# Altium PCB tuch-tablotara.PcbDoc
Units mm, origin at the board's own origin, x right, y up, seen from the top; angles counter-clockwise.
Board outline 151 x 86.38 mm, 2 copper layers (Top Layer, Bottom Layer); 7 components, 7 nets, 17 pads, 0 vias.
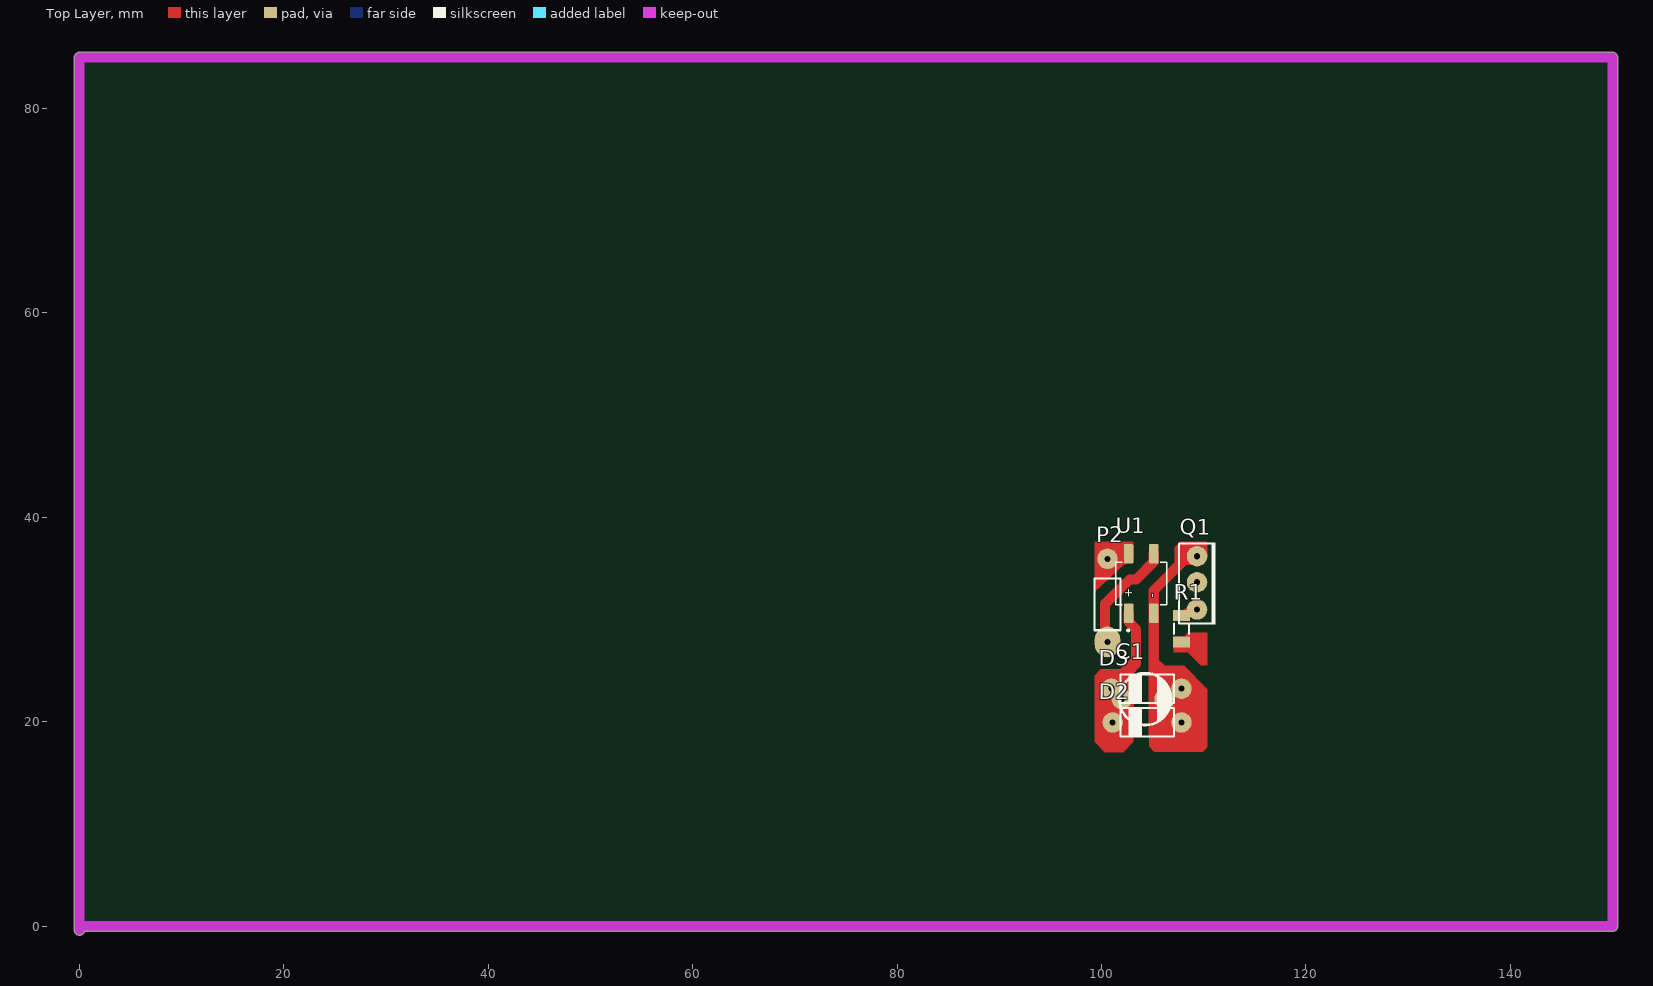
[diagram p0: Top Layer view]
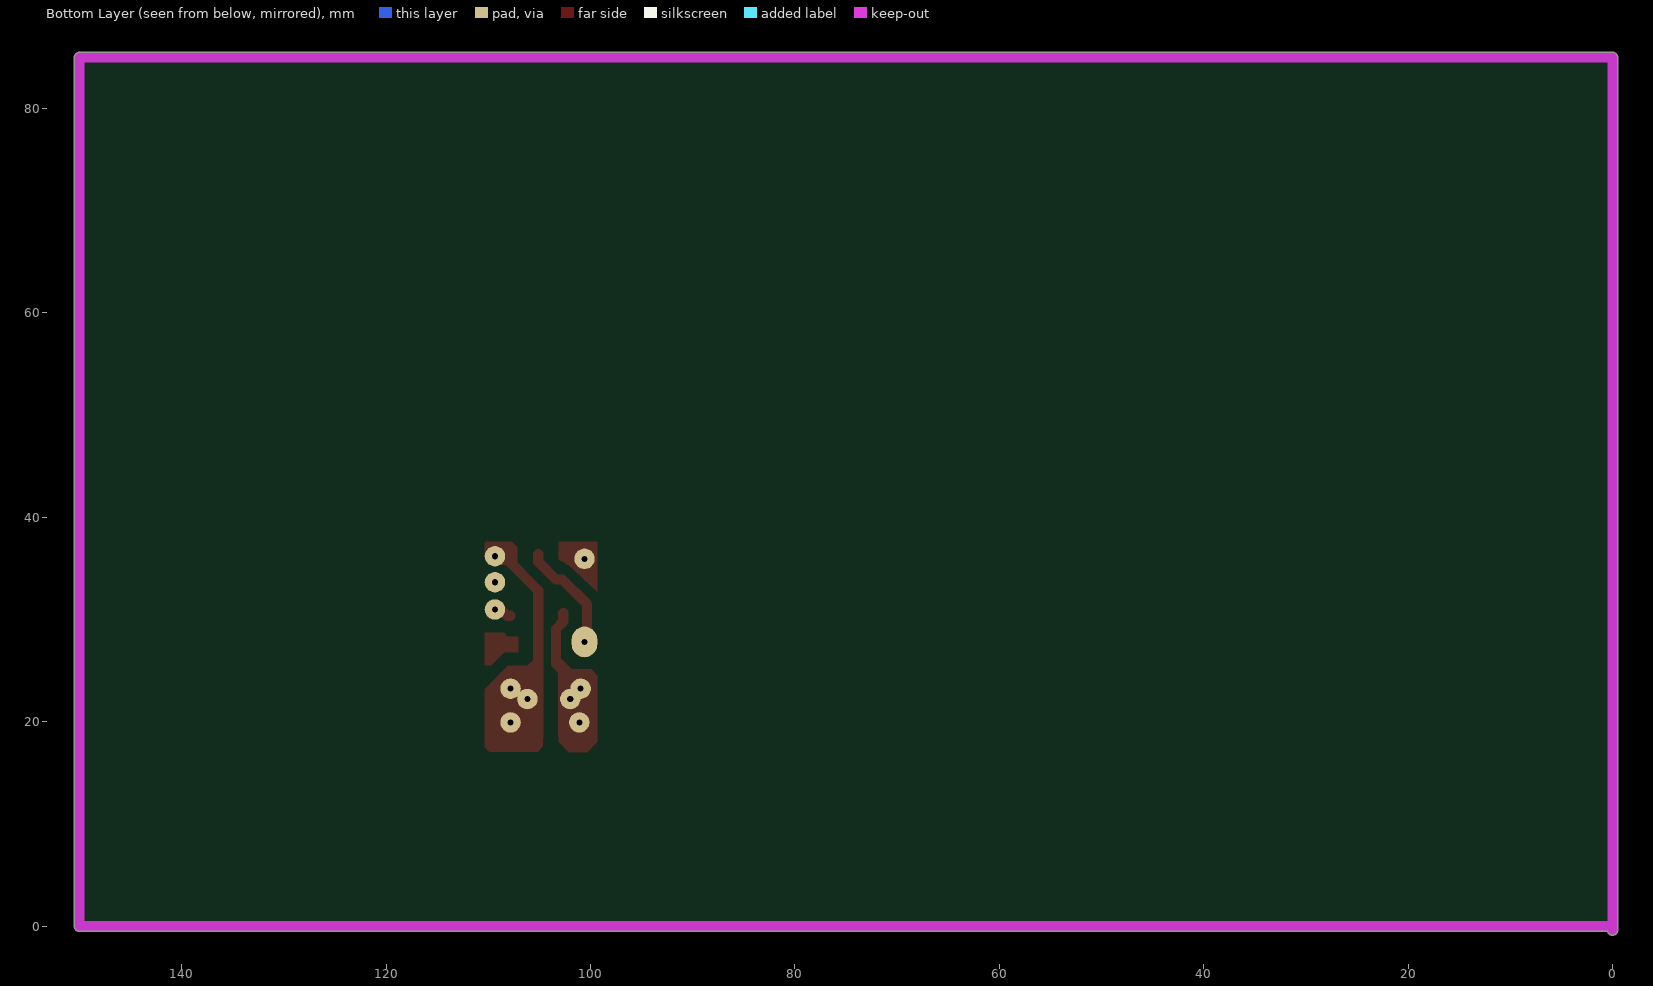
[diagram p1: Bottom Layer view, seen from below]
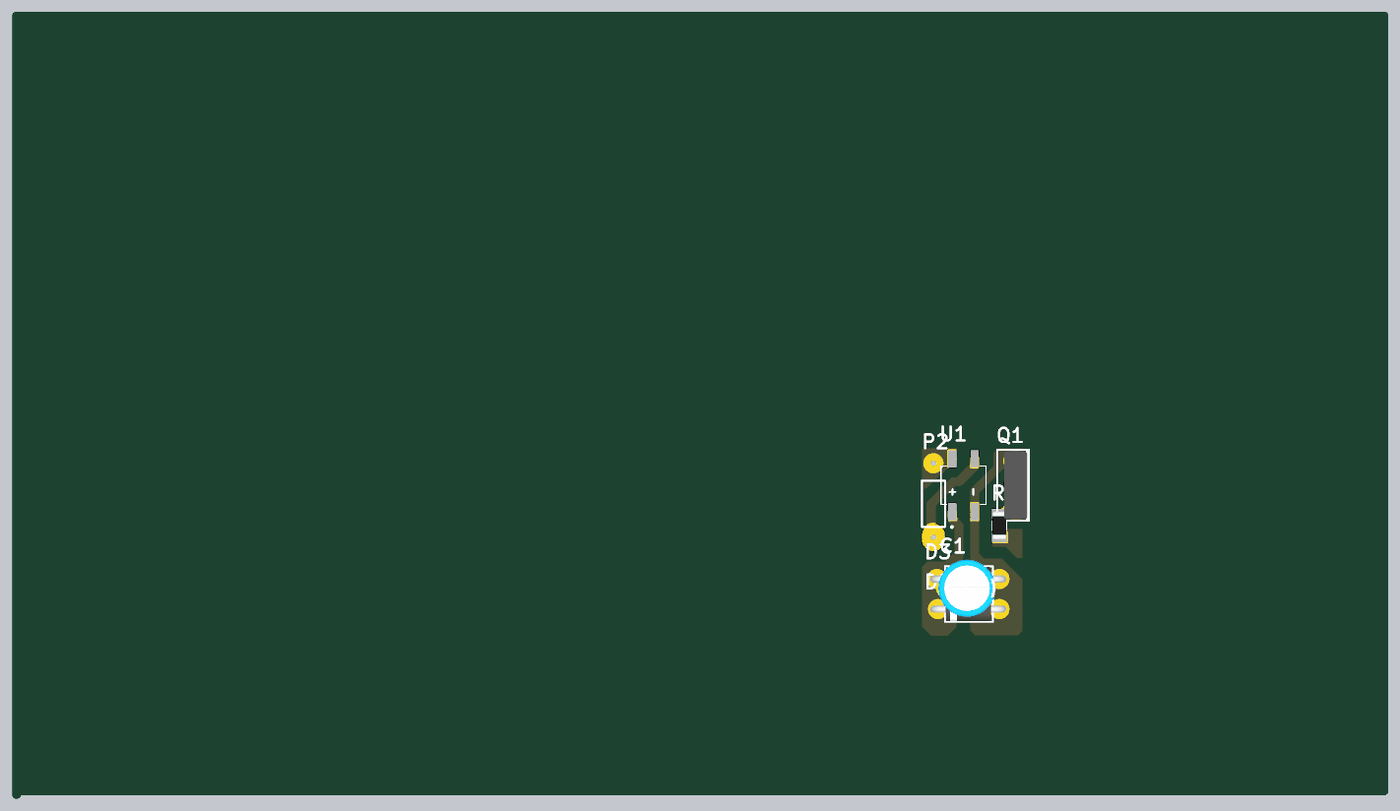
[diagram p2: 3D render of the assembled board from above, using the file's embedded part models]

## Layer stack, top to bottom
Top Solder: solder mask 0.0102, Solder Resist, Dk 3.5
Top Layer: signal copper 0.0356
Dielectric 1: dielectric 0.32, FR-4, Dk 4.8
Bottom Layer: signal copper 0.0356
Bottom Solder: solder mask 0.0102, Solder Resist, Dk 3.5

## Board outline
-0.5,-0.381 -0.5,85 cw(c0,85) 0,85.5 150,85.5 cw(c150,85) 150.5,85 150.5,0 cw(c150,0) 150,-0.5 0.486,-0.5 cw(c0,-0.381)

## Design rules (kind name [scope] priority, off if disabled: settings)
Clearance Clearance_1 [InPolygon] p1: gap=0.8 ignorepadtopadclearanceinfootprint=FALSE
Clearance [All] p2: gap=0.254 ignorepadtopadclearanceinfootprint=FALSE except(0: Arc-Hole Track-Hole SMDPad-Hole THPad-Hole Via-Hole Fill-Hole Poly-Hole Region-Hole Text-Hole)
PolygonConnect [All] p1: connectstyle=Relief reliefconductorwidth=0.254 reliefentries=4 polygonreliefangle="90 Angle" airgapwidth=0.254
RoomDefinition tuch-tablotara [InComponentClass('tuch-tablotara')] p1: confinementstyle=ConfineIn formatcopy=TRUE lockcomponents=FALSE outline 144.907,-4.953 247.904,-4.953 247.904,23.114 144.907,23.114
RoutingLayers [All] p1: top layer_v5=FALSE bottom layer_v5=TRUE
RoutingVias [All] p1: holewidth=0.711 width=2.5 viastyle="Through Hole" minholewidth=0.711 minwidth=1.27 maxholewidth=0.711 maxwidth=2
SolderMaskExpansion [All] p1: expansion=0.102 istentingtop=FALSE
Width [All] p1: maxlimit=3 minlimit=0.5 preferedwidth=1
29 further rules are at their usual default settings.

## Components (designator, comment, footprint, x,y, rotation, side; value= is the part's Value field where it differs from the comment)
C1 "=Value" ELEC-CAP-RAD10-20 104.267,22.225 r180 top
D2 "MODEL" DO-41#1 108.204,19.939 r180 top
D3 "MODEL" DO-41#2 108.204,23.241 r180 top
P2 "Header 2" HDR1X2 100.584,32.766 r270 top
Q1 "MODEL" SOT32 109.347,33.528 r270 top
R1 "10K" "RES 1206 (3216X08L)" 107.823,29.108 r90 top
U1 "MB6S" SOIC245P670X270-4N 103.886,33.528 r90 top

## Footprints (in the part's own frame and the unit in brackets; to place one, negate y for a bottom-side part, rotate by r counter-clockwise, add the part's x,y. Pads: shape width x height; smd on the part's side, far side on the other; paste and mask are expansions set on the pad)
DO-41#1 [mm]
  round 2 hole 0.6: 1(0.381,0) 2(7.112,0)
  silkscreen extent 1.1,-1.5 6.35,1.5, body extent -0.41,-1.33 8,1.33, height 3.33
DO-41#2 [mm]
  round 2 hole 0.6: 1(0.381,0) 2(7.239,0)
  silkscreen extent 1.1,-1.5 6.35,1.5, body extent -0.41,-1.33 8,1.33, height 3.33
ELEC-CAP-RAD10-20 [mm]
  round 2 hole 0.6: 1(-1.905,0) 2(2.286,0)
  silkscreen extent -2.54,-2.54 2.54,2.54, body extent -3.15,-3.15 3.15,3.15, height 10.26
HDR1X2 [mm] "Connector; Header; 2 Position"
  round 2 hole 0.6: 1(-3.175,0)
  oval 3x2.5 hole 0.6: 2(4.953,0)
  silkscreen extent -1.27,-1.27 3.81,1.27
"RES 1206 (3216X08L)" [mm] "Chip Resistor, 2-Leads, Body 3.2x1.6mm, IPC High Density _ (0.125 W)"
  rect 1.05x1.7 smd: 1(-1.295,0) 2(1.301,0)
  silkscreen extent -0.5,-0.75 0.5,0.75, body extent -1.52,-0.76 1.53,0.76, height 0.6
SOIC245P670X270-4N [mm]
  rrect23% 1.91x0.91 smd: 1(-2.9,1.225) 2(-2.9,-1.225) 3(2.9,-1.225) 4(2.9,1.225)
  silkscreen extent -4.68,-2.48 2.1,2.48
SOT32 [mm] "SIP with Mounting Hole; 3 Leads; Body 10.7 x 7.6 x 2.6 mm (typ); Pitch 2.2 mm"
  round 2 hole 0.6: 1(-2.667,0) 2(-0.127,0) 3(2.54,0)
  silkscreen extent -4,-1.78 4,1.8, body extent -3.8,-1 3.8,1.55, height 15.19

## Part data
C1: library part "Capacitor Electrolytic", "Electrolytic Capacitor"
D2 D3: library part Diode, "Diode", MODEL=1N4148
P2: "Header, 2-Pin", LatestRevisionDate=17-Jul-2002, LatestRevisionNote="Re-released for DXP Platform.", Publisher="Altium Limited"
Q1: library part BD139, "NPN Bipolar Transistor"
R1: library part Resistor, "Resistor", Power="1/4 W", Tolerance=5%
U1: "Bridge Rectifier Single Phase Standard 600V Surface Mount 4-SOIC", Package="BESOP-4 Surge Components", Digi-Key_Part_Number=MB6SCT-ND, Digi-Key_Purchase_URL=https://www.digikey.com.tr/product-detail/en/on-semiconductor/MB6S/MB6SCT-ND/965654?utm_source=snapeda&utm_medium=aggregator&utm_campaign=symbol, MF="ON Semiconductor", MP=MB6S, SnapEDA_Link=https://www.snapeda.com/parts/MB6S/ON%20Semiconductor/view-part/2774209/?ref=snap

## Nets (pads, with @x,y where several pads share a name; then routed paths per layer and width w, separated by ;. In a path a pad name is that pad's centre, name@x,y a point inside that pad or via, vN(x,y) a via of type N, cw(c..) or ccw(c..) an arc to the next point about the centre after c; other vN are vias at no path point)
GND: C1.1 D2.1 D3.1 Q1.1 U1.2 | length 28.7
  Top Layer w1: 107.95,18.034 105.697,18.034 105.111,18.62 105.111,21.209 ; 107.95,21.209 105.111,21.209 ; 107.95,24.384 107.787,24.547 105.111,24.547 ; Q1.1 108.997,35.845 108.108,35.845 105.111,32.848 U1.2 105.111,24.547 ; 105.111,21.209 105.111,24.547
NetP1_2: R1.1
NetP2_1: P2.1 U1.4 | length 2.4
  Top Layer w1: P2.1@100.33,36.322 100.383,36.375 102.616,36.375 102.661,36.42 U1.4
NetP2_2: P2.2 U1.3 | length 10.6
  Top Layer w1: P2.2@100.33,28.194 100.33,31.496 102.743,33.909 103.378,33.909 105.111,35.642 U1.3
NetP3_2: Q1.2
NetQ1_3: Q1.3 R1.2 | length 1.8
  Top Layer w1: R1.2@107.823,30.384 108.148,30.384 108.561,30.797 109.156,30.797 Q1.3
VCC: C1.2 D2.2 D3.2 U1.1 | length 21.9
  Top Layer w1: 100.33,18.034 101.981,18.034 102.661,18.714 102.661,21.209 ; 100.33,21.209 102.661,21.209 ; 100.33,24.384 102.661,24.384 ; C1.2@102.661,22.225 102.661,24.384 ; U1.1 102.661,29.8 103.378,29.083 103.378,25.654 102.661,24.937 102.661,24.384 ; 102.661,21.209 102.661,24.384

## Polygon pours and split planes (outlines as drawn)
GND on Bottom Layer "GND_L02_P002" (solid, pour order 2): 116.332,39.751
no net on Bottom Layer "NONET_L02_P000" (solid, pour order 0): 91.059,37.973

## Keep-outs
Keep-Out Layer:
  lines w1: 0,-0.381 0,85 150,85 150,0 0,0

## Other copper
Top Layer:
  region net GND: 107.188,35.306 107.188,37.084 107.696,37.592 110.236,37.592 110.363,37.465 110.363,36.068 109.855,35.56
  region net NetP1_2: 110.363,25.527 109.728,25.527 108.458,26.797 107.061,26.797 107.061,28.321 108.077,28.321 108.458,28.702 110.363,28.702
  region net GND: 104.648,25.209 104.648,17.59 105.156,17.081 109.919,17.081 110.363,17.526 110.363,23.177 108.077,25.463 106.172,25.463 105.41,26.226
  region net VCC: 102.87,26.162 101.854,25.146 99.949,25.146 99.314,24.511 99.314,18.034 100.33,17.018 102.108,17.018 103.124,18.034 103.124,25.527
  region net NetP2_1: 102.489,35.56 102.362,35.433 102.224,35.433 99.314,32.746 99.314,37.592 103.124,37.592 103.124,35.941 102.997,35.814
Bottom Layer:
  region: 106.426,36.195
  region: 104.902,34.925

## Text inside footprints (layer, text, board x,y; h text height)
U1: Top Overlay "-" at 105.286,32.128 h0.81 r90; Top Overlay "+" at 102.996,32.129 h0.81 r90